# EAGLE board Display_Block (EAGLE 5.06)

Size 160 x 100 mm. Coordinates in mm from the lower left corner, seen from the top.
Outline: 0,0 160,0 160,100 0,100 0,0
Copper layers (1*16): Top 0.035mm / dielectric 1.5mm / Bottom 0.035mm
Design rules "default": minimum track width 10mil, minimum drill 24mil, track to track 8mil, track to pad 8mil, pad to pad 8mil, via to via 8mil, smd to smd 8mil, copper to edge 40mil, drill to drill 8mil, minimum pad ring 10mil, minimum via ring 8mil, stop-mask expansion 4mil, vias tented up to drill 0mil, thermal gap 10mil

## Footprints (pad centres in the part's own frame; a part is rotated, then mirrored left to right if it is on the bottom)
C0603 = smd 1.1 x 1: 1 -0.85,0; 2 0.85,0
C025-024X044 = drill 0.813 octagon: 1 -1.27,0; 2 1.27,0
DO35-7 = drill 0.813 long: A 3.81,0; C -3.81,0
DO41-10 = drill 1.118 round: A 5.08,0; C -5.08,0
TQFP32-08 = smd 1.27 x 0.559: 1 -4.293,2.8; 2 -4.293,2; 3 -4.293,1.2; 4 -4.293,0.4; 5 -4.293,-0.4; 6 -4.293,-1.2; 7 -4.293,-2; 8 -4.293,-2.8; 17 4.293,-2.8; 18 4.293,-2; 19 4.293,-1.2; 20 4.293,-0.4; 21 4.293,0.4; 22 4.293,1.2; 23 4.293,2; 24 4.293,2.8 | smd 0.559 x 1.27: 9 -2.8,-4.293; 10 -2,-4.293; 11 -1.2,-4.293; 12 -0.4,-4.293; 13 0.4,-4.293; 14 1.2,-4.293; 15 2,-4.293; 16 2.8,-4.293; 25 2.8,4.293; 26 2,4.293; 27 1.2,4.293; 28 0.4,4.293; 29 -0.4,4.293; 30 -1.2,4.293; 31 -2,4.293; 32 -2.8,4.293
B8B-PH-K-S = drill 0.8 pad 1.6 square: 1 -0.085,7; 2 -0.085,5; 3 -0.085,3; 4 -0.085,1; 5 -0.085,-1; 6 -0.085,-3; 7 -0.085,-5; 8 -0.085,-7
AVR-ISP-6 = drill 1.016 square: 1 -2.54,-1.27 | drill 1.016 octagon: 2 -2.54,1.27; 3 0,-1.27; 4 0,1.27; 5 2.54,-1.27; 6 2.54,1.27
R0603 = smd 1 x 1.1: 1 -0.85,0; 2 0.85,0
PT-10 = drill 1.016 pad 1.778 octagon: 1 -2.54,-5.08; 2 2.54,-5.08; 3 0,5.08
TP20SQ = smd 2 x 2: TP 0,0
TDCX10X0M = drill 0.8 long: 1 -7.779,-6.35; 2 -5.556,-6.35; 3 -3.334,-6.35; 4 -1.111,-6.35; 5 1.111,-6.35; 6 3.334,-6.35; 7 5.556,-6.35; 8 7.779,-6.35; 9 7.779,6.35; 10 5.556,6.35; 11 3.334,6.35; 12 1.111,6.35; 13 -1.111,6.35; 14 -3.334,6.35; 15 -5.556,6.35; 16 -7.779,6.35
SO08 = smd 0.6 x 2.2: 1 -1.905,-2.6; 2 -0.635,-2.6; 3 0.635,-2.6; 4 1.905,-2.6; 5 1.905,2.6; 6 0.635,2.6; 7 -0.635,2.6; 8 -1.905,2.6
SOT223 = smd 1.194 x 2.21: 1 -2.311,-3.099; 2 0,-3.099; 3 2.311,-3.099 | smd 3.505 x 2.21: VOUT 0,3.099
SOT23 = smd 1 x 1.4: 1 -0.95,-1.1; 2 0.95,-1.1; 3 0,1.1

## Placement (x,y rotation side)
C11  1u  [C0603]  -59.69,74.93 0 top  (outside the outline)
C12  1u  [C0603]  -49.53,74.93 0 top  (outside the outline)
C13  1u  [C0603]  -54.61,74.93 0 top  (outside the outline)
C14  10uF  [C0603]  -25.4,74.93 0 top  (outside the outline)
C15  10uF  [C0603]  -31.75,74.93 0 top  (outside the outline)
C16  0.1u 50V  [C025-024X044]  -26.67,67.31 0 top  (outside the outline)
D5  [DO35-7]  -19.05,85.09 0 top  (outside the outline)
D6  [DO35-7]  -31.75,85.09 0 top  (outside the outline)
D7  [DO41-10]  -19.05,80.01 0 top  (outside the outline)
D8  [DO41-10]  -31.75,80.01 0 top  (outside the outline)
IC1  ATMEGA8L-8AU  [TQFP32-08]  -31.75,53.34 0 top  (outside the outline)
J1  B8B-PH-K-S  [B8B-PH-K-S]  -59.69,35.56 0 top  (outside the outline)
JP1  AVR-ISP-6  [AVR-ISP-6]  -43.18,53.34 0 top  (outside the outline)
R1  100k  [R0603]  -38.1,74.93 0 top  (outside the outline)
R2  20k  [R0603]  -64.77,74.93 0 top  (outside the outline)
R5  120k  [R0603]  -44.45,74.93 0 top  (outside the outline)
R6  20k  [R0603]  -69.85,74.93 0 top  (outside the outline)
R7  1k  [R0603]  -15.24,74.93 0 top  (outside the outline)
R8  1k  [R0603]  -19.05,74.93 0 top  (outside the outline)
R13  2k  [PT-10]  -69.85,31.75 0 top  (outside the outline)
R14  1k  [R0603]  -33.02,67.31 0 top  (outside the outline)
R15  1k  [R0603]  -38.1,67.31 0 top  (outside the outline)
R16  1k  [R0603]  -43.18,67.31 0 top  (outside the outline)
R17  1k  [R0603]  -48.26,67.31 0 top  (outside the outline)
R18  1k  [R0603]  -53.34,67.31 0 top  (outside the outline)
R19  1k  [R0603]  -58.42,67.31 0 top  (outside the outline)
R20  2k  [PT-10]  -19.05,55.88 0 top  (outside the outline)
R21  1k  [R0603]  -63.5,67.31 0 top  (outside the outline)
R30  1k  [R0603]  -68.58,67.31 0 top  (outside the outline)
R36  1k  [R0603]  -73.66,67.31 0 top  (outside the outline)
SCL  TPTP20SQ  [TP20SQ]  -57.15,80.01 0 top  (outside the outline)
SCL1  TPTP20SQ  [TP20SQ]  -41.91,80.01 0 top  (outside the outline)
SDA  TPTP20SQ  [TP20SQ]  -52.07,80.01 0 top  (outside the outline)
SEG1  TDCG1050M-ND  [TDCX10X0M]  -33.02,8.89 0 top  (outside the outline)
SEG2  TDCR1050M-ND  [TDCX10X0M]  -33.02,33.02 0 top  (outside the outline)
U5  LM358D  [SO08]  -52.07,52.07 0 top  (outside the outline)
U7  AZ1117IH-5.0TRG1  [SOT223]  -69.85,52.07 0 top  (outside the outline)
U8  AS431  [SOT23]  -17.78,68.58 0 top  (outside the outline)
V+  TPTP20SQ  [TP20SQ]  -60.96,80.01 0 top  (outside the outline)
V-  TPTP20SQ  [TP20SQ]  -64.77,80.01 0 top  (outside the outline)
VCC  TPTP20SQ  [TP20SQ]  -46.99,80.01 0 top  (outside the outline)

## Library data of the parts
C11-C16 R1 R2 R5 R6 R13 R20 = rcl
D5-D8 = diode
IC1 = atmega8
J1 SEG1 SEG2 U7 U8 = VladimirG
JP1 = avr-4
R7 R8 R14-R19 R21 R30 R36 = resistor
SCL SCL1 SDA V+ V- VCC = testpad
U5 = linear

## Nets
+12V: C16.2 J1.3 U5.8
-12V: C16.1 J1.2 U5.4
ADC+: D6.A IC1.19 R36.2
ADC-: D5.A IC1.22 R7.2
AN1: IC1.23 SEG1.1
AN2: IC1.24 SEG1.2
AN3: IC1.25 SEG1.6
AN4: IC1.26 SEG1.8
AN5: IC1.12 SEG2.1
AN6: IC1.13 SEG2.2
AN7: IC1.7 SEG2.6
AN8: IC1.8 SEG2.8
AREF: C11.1 IC1.20 R8.2 U8.1 U8.2
DP_SEG: R30.2 SEG1.7 SEG2.7
GND: C11.2 C12.2 C13.2 C14.1 C15.1 IC1.3 IC1.5 IC1.21 J1.1 JP1.6 R2.1 R13.2 R13.3 R20.2 R20.3 U5.3 U5.5 U7.2 U8.3
MISO: IC1.16 JP1.1
MOSI: IC1.15 JP1.4
N$1: IC1.30 R14.1
N$4: IC1.31 R15.1
N$5: U5.6 U5.7
N$6: IC1.32 R16.1
N$7: IC1.1 R17.1
N$11: IC1.2 R18.1
N$12: IC1.9 R19.1
N$13: IC1.10 R21.1
N$14: IC1.11 R30.1
N$16: R5.2 R6.1 U5.2
N$19: C14.2 D7.C D8.C U7.1
REG+: J1.7 R13.1
REG-: J1.6 R20.1
RESET: IC1.29 JP1.5
SCK: IC1.17 JP1.3
SCL: IC1.28 SCL.TP
SDA: IC1.27 SDA.TP
SEG_A: R14.2 SEG1.14 SEG2.14
SEG_B: R15.2 SEG1.16 SEG2.16
SEG_C: R16.2 SEG1.13 SEG2.13
SEG_D: R17.2 SEG1.3 SEG2.3
SEG_E: R18.2 SEG1.5 SEG2.5
SEG_F: R19.2 SEG1.11 SEG2.11
SEG_G: R21.2 SEG1.15 SEG2.15
SS: IC1.14 SCL1.TP
V+: R1.2 R2.2 R36.1 V+.TP
V-: R6.2 R7.1 U5.1 V-.TP
V_NEG_REG: J1.4 R5.1
V_POD_REG: J1.5
V_POS_REG: R1.1
V_UNREG+: D7.A J1.8
VCC: C12.1 C13.1 C15.2 D5.C D6.C D8.A IC1.4 IC1.6 IC1.18 JP1.2 R8.1 U7.3 VCC.TP

## Tracks (layer width: path | path; a pad name or v marks a point on that pad's centre or on a via)
+12V  (2 unrouted)
-12V  (2 unrouted)
ADC+  (2 unrouted)
ADC-  (2 unrouted)
AN1  (1 unrouted)
AN2  (1 unrouted)
AN3  (1 unrouted)
AN4  (1 unrouted)
AN5  (1 unrouted)
AN6  (1 unrouted)
AN7  (1 unrouted)
AN8  (1 unrouted)
AREF  (4 unrouted)
DP_SEG  (2 unrouted)
GND  (18 unrouted)
MISO  (1 unrouted)
MOSI  (1 unrouted)
N$1  (1 unrouted)
N$4  (1 unrouted)
N$5  (1 unrouted)
N$6  (1 unrouted)
N$7  (1 unrouted)
N$11  (1 unrouted)
N$12  (1 unrouted)
N$13  (1 unrouted)
N$14  (1 unrouted)
N$16  (2 unrouted)
N$19  (3 unrouted)
REG+  (1 unrouted)
REG-  (1 unrouted)
RESET  (1 unrouted)
SCK  (1 unrouted)
SCL  (1 unrouted)
SDA  (1 unrouted)
SEG_A  (2 unrouted)
SEG_B  (2 unrouted)
SEG_C  (2 unrouted)
SEG_D  (2 unrouted)
SEG_E  (2 unrouted)
SEG_F  (2 unrouted)
SEG_G  (2 unrouted)
SS  (1 unrouted)
V+  (3 unrouted)
V-  (3 unrouted)
V_NEG_REG  (1 unrouted)
V_UNREG+  (1 unrouted)
VCC  (12 unrouted)